# Altium PCB filament-width-sensor.PcbDoc
Units mm, origin at the board's own origin, x right, y up, seen from the top; angles counter-clockwise.
Board outline 50 x 23 mm, 2 copper layers (Top Layer, Bottom Layer), stack 1.581 mm thick; 31 components, 25 nets, 138 pads, 27 vias.
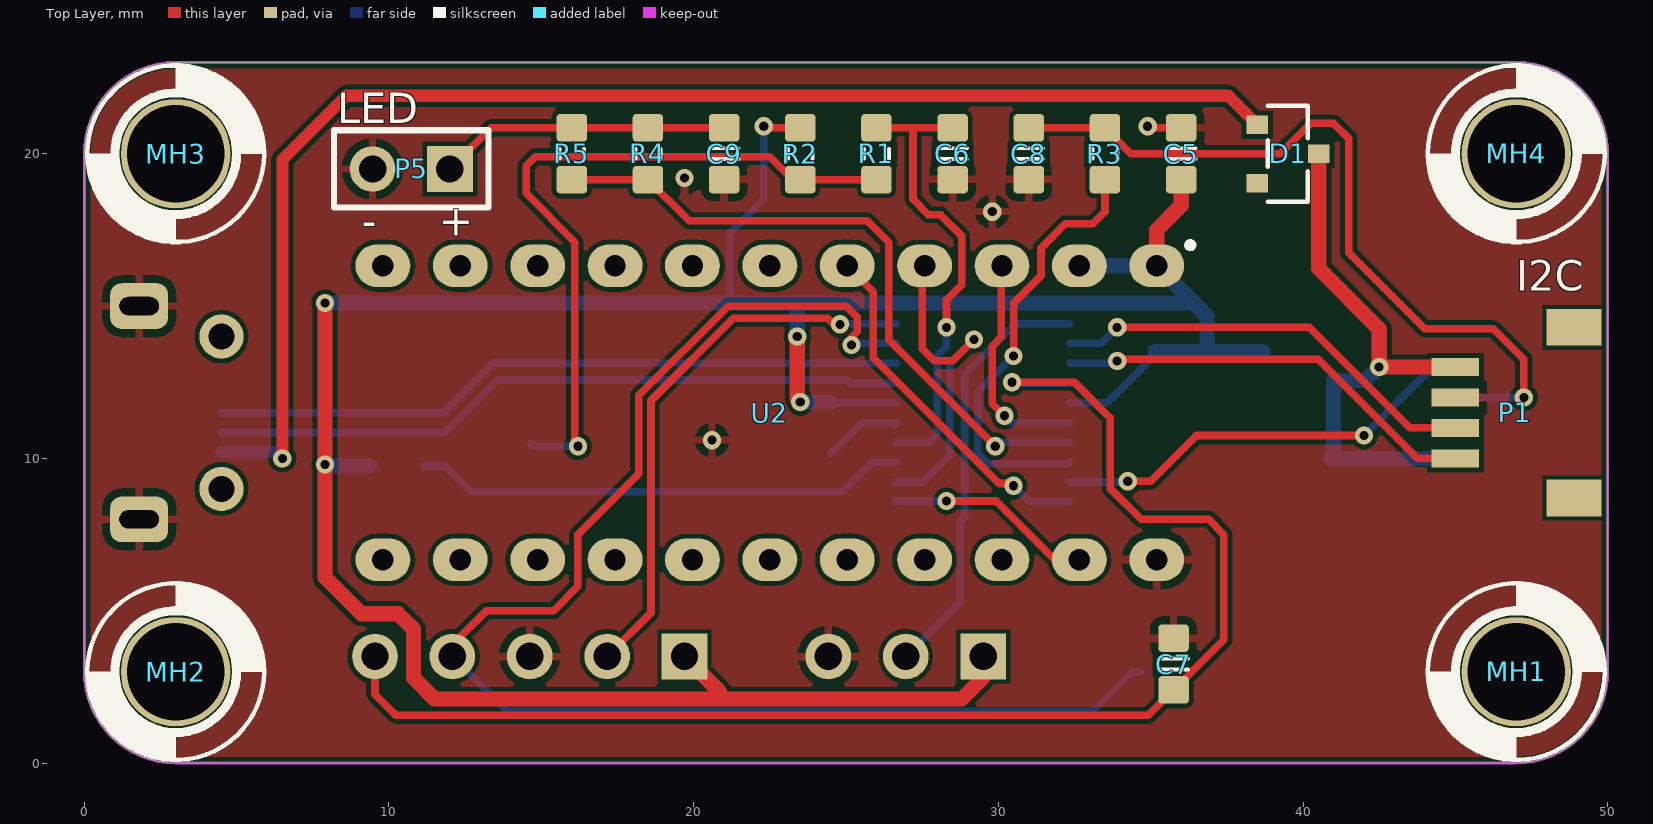
[diagram p0: Top Layer view]
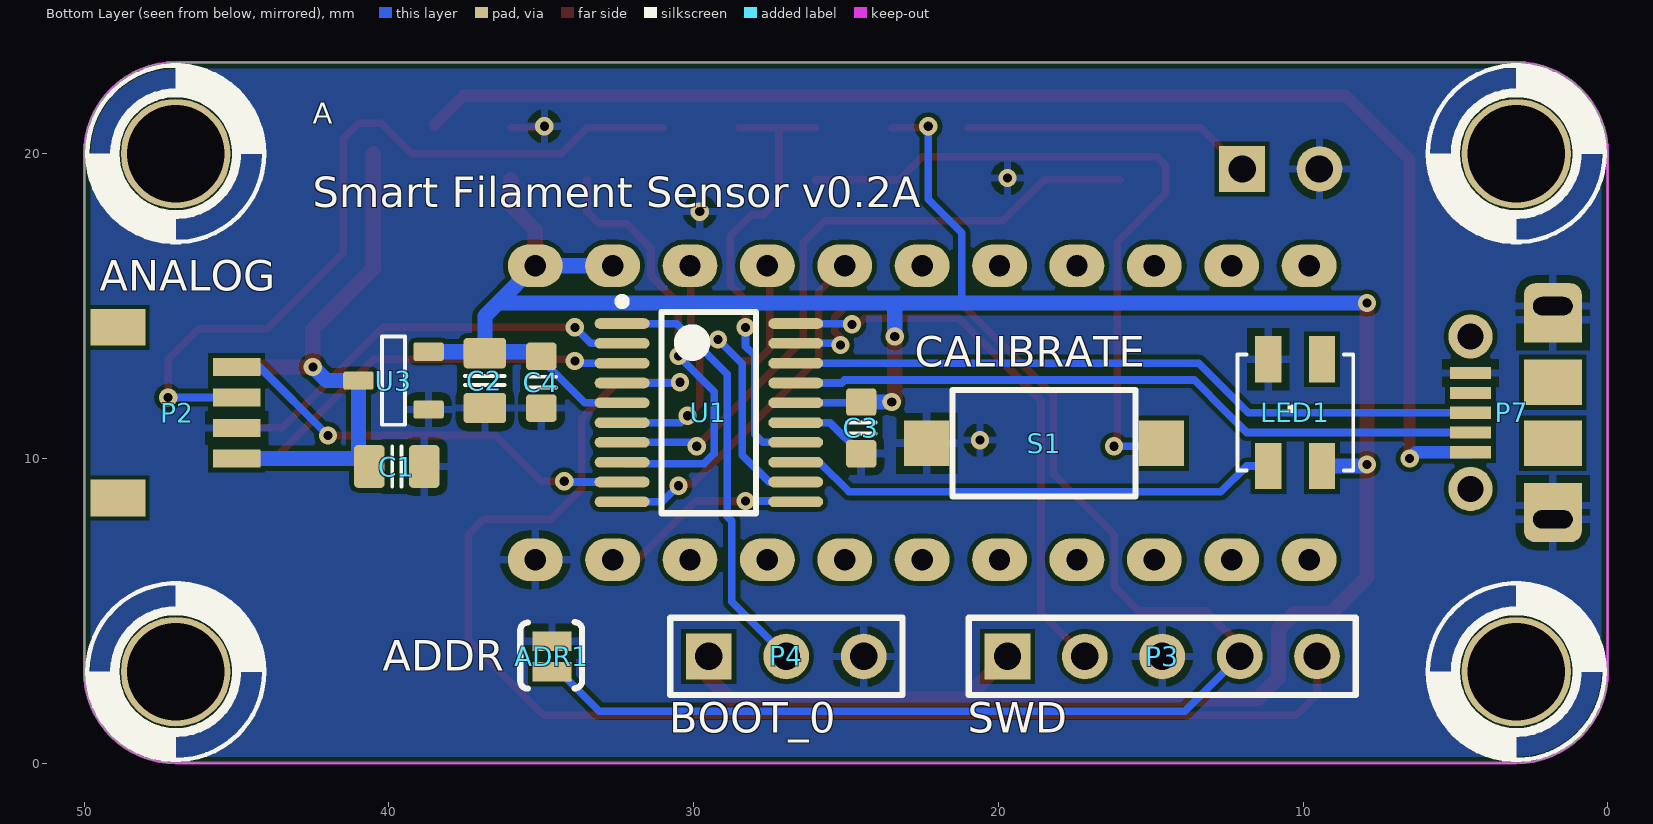
[diagram p1: Bottom Layer view, seen from below]
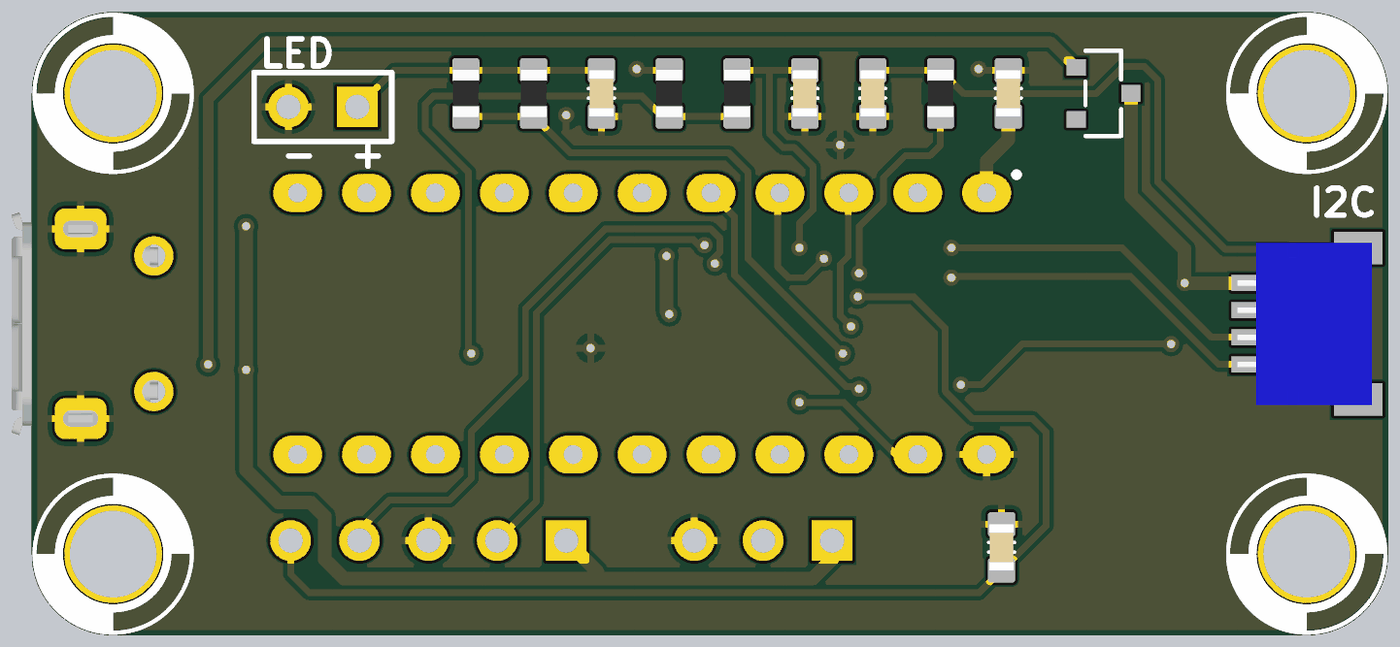
[diagram p2: 3D render of the assembled board from above, using the file's embedded part models]
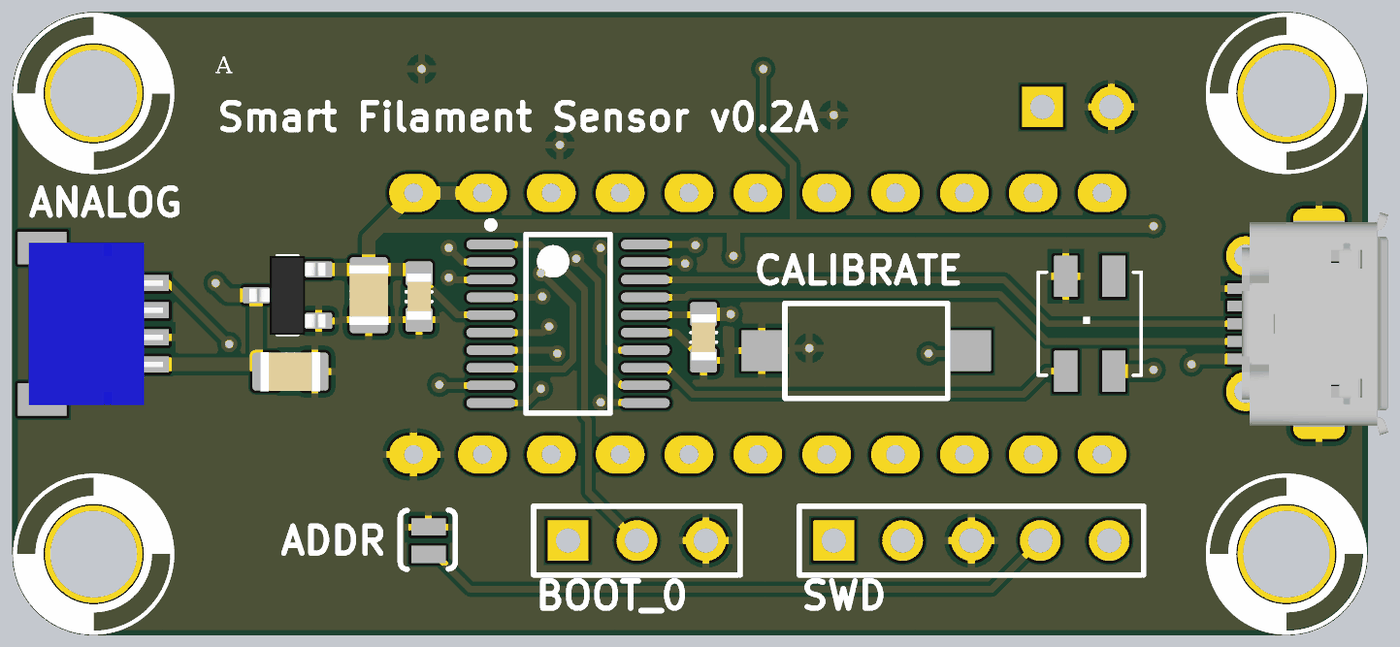
[diagram p3: 3D render of the assembled board from below, using the file's embedded part models]

## Layer stack, top to bottom
Top Solder: solder mask 0.0102, Solder Resist, Dk 3.5
Top Layer: signal copper 0.0356
Dielectric1: dielectric 1.51, FR-4, Dk 4.8
Bottom Layer: signal copper 0.0356
Bottom Solder: solder mask 0.0102, Solder Resist, Dk 3.5

## Board outline
0,3 ccw(c3,3) 3,0 47,0 ccw(c47,3) 50,3 50,20 ccw(c47,20) 47,23 3,23 ccw(c3,20) 0,20

## Design rules (kind name [scope] priority, off if disabled: settings)
Clearance [All] p1: gap=0.15
DiffPairsRouting [All] p1: maxlimit=0.5 minlimit=0.25 mostfreqgap=0.25 toplayer_minwidth=0.25 toplayer_maxwidth=0.5 toplayer_prefwidth=0.25 bottomlayer_minwidth=0.25 bottomlayer_maxwidth=0.5 bottomlayer_prefwidth=0.25 maxuncoupledlength=12.7
FabricationTestPointUsage TestPointUsage [All] p1: valid=0 allowmultiple=FALSE
FabricationTestpoint Testpoint [All] p1: side=3 testpointundercomponent=TRUE minsize=1.016 maxsize=2.54 preferedsize=1.524 minholesize=0 maxholesize=1.016 preferedholesize=0.813 testpointgrid=0.025 allowsidetop=TRUE allowsidebottom=TRUE usegrid=TRUE gridtolerance=0
HoleSize [All] p1: absolutevalues=TRUE maxlimit=3.5 minlimit=0.025 maxpercent=80.000 minpercent=20.000
PolygonConnect [All] p1: connectstyle=Relief reliefconductorwidth=0.254 reliefentries=4 polygonreliefangle="90 Angle" airgapwidth=0.254
RoutingVias [All] p1: holewidth=0.3 width=0.6 viastyle="Through Hole" minholewidth=0.3 minwidth=0.6 maxholewidth=1 maxwidth=1.4
SilkToSolderMaskClearance SilkscreenOverComponentPads [IsPad] p1: minsilkscreentomaskgap=0.254 clearancetoexposedcopper=TRUE
SolderMaskExpansion [All] p1: expansion=0.102
Width [All] p1: maxlimit=1 minlimit=0.2 preferedwidth=0.25
25 further rules are at their usual default settings.

## Classes and differential pairs
differential pair USB: +USB_P -USB_N

## Components (designator, comment, footprint, x,y, rotation, side; value= is the part's Value field where it differs from the comment)
ADR1 "JUMPER-PAD-2-NC_BY_TRACE" PAD-JUMPER-2-NC_BY_TRACE_YES_SILK 34.65,3.5 r270 bottom
C1 "approved sub OK" CAPC2012X135N 39.742,9.734 r180 bottom
C2 "approved sub OK" CAPC2012X135N 36.852,12.554 r270 bottom
C3 "approved sub OK" CAPC1608X90N 24.5,11 r270 bottom
C4 "approved sub OK" CAPC1608X90N 35,12.5 r270 bottom
C5 "approved sub OK" CAPC1608X90N 36,20 r90 top
C6 "approved sub OK" CAPC1608X90N 28.5,20 r270 top
C7 "approved sub OK" CAPC1608X90N 35.75,3.25 r90 top
C8 "approved sub OK" CAPC1608X90N 31,20 r270 top
C9 "approved sub OK" CAPC1608X90N 21,20 r270 top
D1 "Diode   SMADIODE - SMA Surface Mount Package  20V 1A Schottky Diode Digikey: 641-1014-6-ND    DO-1N4148 - Through Hole Small Current Diode SOD-123 20V 1 A (.5mV Vf) Schottky Diode - Digikey: MBRX120TPMSCT-ND    SOD-323 10V 570mA (.38mV Vf, 3ns) Schottky Diode - Digikey: ZLLS410CT-ND    SOD-523 30V 30mA Schottky Diode (RB751S-40TE61) - Digikey: RB751S-40TE61CT-ND    SOT23-R/W - SOT23 Package (R = Solder Paste/Reflow Ovens, W = Hand-Soldering)  BAT54Film 40V 300mA - Digikey: 497-7162-1-ND" SOT23-R 39.5,20 r270 top
LED1 "WS2812B3535" LED3535 10.25,11.5 r90 bottom
MH1 "M3" M3-Hole-2 47,3 r0 top
MH2 "M3" M3-Hole-2 3,3 r0 top
MH3 "M3" M3-Hole-2 3,20 r0 top
MH4 "M3" M3-Hole-2 47,20 r0 top
P1 "I2C" SM04B-SRSS-TB 45,13 r0 top
P2 "ANA" SM04B-SRSS-TB 45,10 r0 bottom
P3 "SWD" HDR1X5 19.7,3.5 r180 bottom
P4 "BOOT_SEL" HDR1X3 29.5,3.5 r180 bottom
P5 "LED" HDR1X2 12,19.5 r180 top
P7 "Micro-USB B Socket" "Micro-USB B Molex 105017-0001" 4.5,11.5 r90 bottom
R1 "Thick Film" RESC1608X55N 26,20 r270 top
R2 "Thick Film" RESC1608X55N 23.5,20 r270 top
R3 "Thick Film" RESC1608X55N 33.5,20 r270 top
R4 "Thick Film" RESC1608X55N 18.5,20 r90 top
R5 "RES_EMPTY_0603" RESC1608X55N 16,20 r90 top
S1 "CALIBRATE" "SW-PB SMD 2pin" 18.5,10.5 r0 bottom
U1 "STM32F042F4P6" STM-TSSOP20_N 29.5,11.5 r180 bottom
U2 "TCD1304AP" "TCD1304AP LINEAR CCD" 22.5,11.5 r180 top
U3 "AP7313-33SR" SOT23-3 39.852,12.554 r0 bottom

## Footprints (in the part's own frame and the unit in brackets; to place one, negate y for a bottom-side part, rotate by r counter-clockwise, add the part's x,y. Pads: shape width x height; smd on the part's side, far side on the other; paste and mask are expansions set on the pad)
CAPC1608X90N [mm] "Chip Capacitor, Body 1.6x0.8mm, EIA 0603, IPC Medium Density"
  round 0.254 on Mech15: 0(0,0)
  rrect25% 0.9x1 smd: 1(-0.85,0) 2(0.85,0)
  Top Layer pour cut-out: -0.6,0.5 -0.4,0.7 0.4,0.7 0.6,0.5 0.6,-0.5 0.4,-0.7 -0.4,-0.7 -0.6,-0.5
  silkscreen extent -0.18,-0.48 0.18,0.48, body extent -0.85,-0.45 0.85,0.45, height 0.89
CAPC2012X135N [mm] "Chip Capacitor, Body 2.0x1.2mm, EIA 0805, IPC Medium Density"
  round 0.254 on Mech15: 0(0,0)
  rrect25% 1x1.4 smd: 1(-0.9,0) 2(0.9,0)
  Top Layer pour cut-out: -0.675,0.7 -0.475,0.9 0.475,0.9 0.675,0.7 0.675,-0.7 0.475,-0.9 -0.475,-0.9 -0.675,-0.7
  silkscreen extent -0.15,-0.65 0.15,0.65, body extent -1.1,-0.72 1.1,0.73, height 1.34
HDR1X2 [mm] "Connector; Header; 2 Position"
  rect 1.5x1.5 hole 0.9: 1(0,0)
  round 1.5 hole 0.9: 2(2.54,0)
  silkscreen extent -1.27,-1.27 3.81,1.27
HDR1X3 [mm] "Connector; Header; 3 Position"
  rect 1.5x1.5 hole 0.9: 1(0,0)
  round 1.5 hole 0.9: 2(2.54,0) 3(5.08,0)
  silkscreen extent -1.27,-1.27 6.35,1.27
HDR1X5 [mm] "Connector; Header; 5 Position"
  rect 1.5x1.5 hole 0.9: 1(0,0)
  round 1.5 hole 0.9: 2(2.54,0) 3(5.08,0) 4(7.62,0) 5(10.16,0)
  silkscreen extent -1.27,-1.27 11.43,1.27
LED3535 [mil]
  rect 59.69x34 smd: 1(-68.9,35) 2(-68.9,-34.45) 3(69,-34.45) 4(69,35)
  silkscreen extent -75,-75 75,75
M3-Hole-2 [mm]
  round 3.6 hole 3.2: M3(0,0)
  silkscreen extent -2.9,-2.93 2.9,2.93
"Micro-USB B Molex 105017-0001" [mm]
  round 1.45 hole 0.85: 4(-2.5,0) 5(2.5,0)
  rect 1.5x1.9 smd: 6(-1,-2.7) 7(1,-2.7) SHIELD(-3.05,-2.7) SHIELD(3.05,-2.7)
  rect 0.4x1.35 smd: D+(0,0) D-(-0.65,0) GND(1.3,0) ID(0.65,0) VBUS(-1.3,0)
  rrect50% 1.5x1.9 hole 0.6 slot 1.3 at 90 deg paste+0: SHIELD(-3.5,-2.7) SHIELD(3.5,-2.7)
  body extent -4.1,-5.25 4.1,0.15, height 2.68
PAD-JUMPER-2-NC_BY_TRACE_YES_SILK [mm]
  rect 0.635x1.27 smd: 1(-0.5,0) 2(0.508,0)
RESC1608X55N [mm] "Chip Resistor, Body 1.6x0.8mm, EIA 0603, IPC Medium Density"
  round 0.254 on Mech15: 0(0,0)
  rrect25% 0.9x1 smd: 1(-0.85,0) 2(0.85,0)
  Top Layer pour cut-out: -0.6,0.5 -0.4,0.7 0.4,0.7 0.6,0.5 0.6,-0.5 0.4,-0.7 -0.4,-0.7 -0.6,-0.5
  silkscreen extent -0.15,-0.41 0.15,0.41, body extent -0.87,-0.47 0.88,0.48, height 0.54
SM04B-SRSS-TB [mm]
  rect 1.55x0.6 smd: 0(0,0) 1(0,-1) 2(0,-2) 3(0,-3)
  rect 1.8x1.2 smd: ""(3.9,-4.3) ""(3.9,1.3)
  body extent -0.55,-4.5 4.4,1.5, height 2.96
SOT23-3 [mm] "SOT23, 3 pin"
  round 0.5 on Mech15: 0(0,0)
  rrect25% 1x0.6 smd: 1(-1.15,0.95) 2(-1.15,-0.95) 3(1.15,0)
  silkscreen extent -0.38,-1.45 0.38,1.45, body extent -1.4,-1.45 1.4,1.45, height 1.29
SOT23-R [mil]
  rect 24x28 smd: 1(-37.4,-39.37) 2(38,-39.37) 3(0,40)
  silkscreen extent -62,-26 62,26
STM-TSSOP20_N [mm] "SOP, 20-Leads, Body 6.6x4.5mm, Pitch 0.65mm, IPC Medium Density"
  oval 1.8x0.35 smd: 1(-2.85,2.925) 2(-2.85,2.275) 3(-2.85,1.625) 4(-2.85,0.975) 5(-2.85,0.325) 6(-2.85,-0.325) 7(-2.85,-0.975) 8(-2.85,-1.625) 9(-2.85,-2.275) 10(-2.85,-2.925) 11(2.85,-2.925) 12(2.85,-2.275) 13(2.85,-1.625) 14(2.85,-0.975) 15(2.85,-0.325) 16(2.85,0.325) 17(2.85,0.975) 18(2.85,1.625) 19(2.85,2.275) 20(2.85,2.925)
  silkscreen extent -2.98,-3.3 1.55,3.77, body extent -2.25,-3.3 2.25,3.3, height 1.2
"SW-PB SMD 2pin" [mm]
  rect 1.5x1.5 smd: 1(-3.85,0) 2(3.85,0)
  silkscreen extent -3,-1.75 3,1.75
"TCD1304AP LINEAR CCD" [mm]
  oval 1.8x1.4 hole 0.7: 6(0,-4.825) 7(2.54,-4.825) 8(5.08,-4.825) 9(7.62,-4.825) 10(10.16,-4.825) 11(12.7,-4.825) 12(12.7,4.825) 13(10.16,4.825) 14(7.62,4.825) 15(5.08,4.825) 16(2.54,4.825) 17(0,4.825) 18(-2.54,4.825) 19(-5.08,4.825) 20(-7.62,4.825) GND(-12.7,4.825) ICG(-7.62,-4.825) MC(-5.08,-4.825) OS(-10.16,4.825) SH(-2.54,-4.825) VAD(-10.16,-4.825) VDD(-12.7,-4.825)

## Part data
C1: library part CAPC_10u_0805_10V, "Capacitor SMD Cer 10uF 10% 10V X5R 0805"
C2: library part CAPC_4u7_0805, "Capacitor SMD Cer 4.7uF 10% 16V X5R 0805"
C3 C4 C5 C6 C7: library part CAPC_100n_0603_X7R_50V_10%, "Capacitor SMD Cer 100nF 10% 50V X7R 0603"
C8 C9: library part CAPC_1u_0603_X7R_16V_10%, "Capacitor SMD Cer 1uF 10% 16V X7R 0603"
D1: library part DIODESOT23_REFLOW
MH1 MH2 MH3 MH4: library part "Screw Hole"
P1 P2: library part SM04B-SRSS-TB
P3: library part "Header 5", "Header, 5-Pin"
P4: library part "Header 3", "Header, 3-Pin"
P5: library part "Header 2", "Header, 2-Pin"
R1 R3: library part RES_1K_0603_5%, "Resistor SMD chip 1k Ohm 0.1W 5% 0603"
R2: library part RES_10K_0603_5%, "Resistor SMD chip 10k Ohm 0.1W 5% 0603"
R4: library part RES_120R_0603_5%, "Resistor SMD chip 120 Ohm 0.1W 5% 0603"
R5: "Resistor, 08603 SMD, Empty footprint"
S1: library part SW-PB
U1: library part STM32F030F4P6, "ARM Cortex-M0 32-bit MCU, 16 KB Flash, 4 KB Internal RAM, 15 I/Os, 20-pin TSSOP, -40 to 85 degC, Tube"
U3: library part VREG_3V3_AP7313-33SR, "Voltage Regulator 3.3V LDO SOT23R-3 SMD"

## Via types
v1: diameter 0.6, hole 0.3, Top Layer to Bottom Layer, tented both sides, 27 vias

## Nets (pads, with @x,y where several pads share a name; then routed paths per layer and width w, separated by ;. In a path a pad name is that pad's centre, name@x,y a point inside that pad or via, vN(x,y) a via of type N, cw(c..) or ccw(c..) an arc to the next point about the centre after c; other vN are vias at no path point)
3V3: C2.1 C3.1 C4.1 C5.1 LED1.2 P3.1 P4.1 R2.1 U1.5 U1.16 U2.VAD U2.VDD U3.2 | length 95.9
  Top Layer w0.25: v1(22.3,20.9) 22.35,20.85 R2.1
  Top Layer w0.5: v1(7.9,15.1) v1(7.9,9.8) 7.9,6.1 9.1,4.9 10.3,4.9 10.8,4.4 10.8,2.8 11.5,2.1 28.8,2.1 29.5,2.8 P4.1 ; P3.1 20.85,2.35 ; v1(23.4,14) 23.4,11.95 v1(23.5,11.85) ; U2.VDD 35.2,17.5 36,18.3 C5.1
  Bottom Layer w0.25: 21.2,15.1 21.2,17.4 22.3,18.5 v1(22.3,20.9) ; C3.1 24.525,11.825 U1.16 ; U1.5 33.575,11.825 35,13.25 C4.1
  Bottom Layer w0.5: v1(7.9,9.8) 7.95,9.75 LED1.2 ; v1(7.9,15.1) 21.2,15.1 23.4,15.1 ; v1(23.4,14) 23.4,15.1 ; v1(23.5,11.85) C3.1 ; U2.VAD U2.VDD 36.425,15.1 ; C4.1@35.154,13.504 C2.1@36.852,13.504 ; C2.1 C2.1@36.852,13.504 ; U3.2 C2.1@36.852,13.504 ; 23.4,15.1 36.425,15.1 ; 36.425,15.1 36.852,14.673 C2.1@36.852,13.504
ADR1: ADR1.2 P3.4 U1.19 | length 47.4
  Top Layer w0.25: P3.4 12.08,3.88 13.2,5 15.4,5 16.2,5.8 16.2,7.5 18.2,9.5 18.2,12.066 21.134,15 25.013,15 25.375,14.638 25.375,14.162 25.18,13.967 v1(25.18,13.72)
  Bottom Layer w0.25: P3.4 13.88,1.7 33.1,1.7 34.392,2.992 ADR1.2 ; v1(25.18,13.72) 25.125,13.775 U1.19
BOOT0: P4.2 U1.1 | length 14.2
  Bottom Layer w0.25: P4.2 28.755,5.295 28.755,7.945 28.9,8.09 28.9,12.766 30.559,14.425 U1.1
BUTTON: C6.1 R1.1 U1.14 | length 15.2
  Top Layer w0.25: R1.1 27.2,20.85 ; v1(28.3,14.3) 28.3,15.2 28.8,15.7 28.8,17.3 28.1,18 27.7,18 27.2,18.5 27.2,20.85 ; C6.1 27.2,20.85
  Bottom Layer w0.25: U1.14 27.725,10.525 28,10.8 28,13.381 28.3,13.681 v1(28.3,14.3)
FIL_DET: P2.3 U1.9 | length 14.2
  Top Layer w0.25: v1(34.25,9.25) 35,9.25 36.5,10.75 v1(42,10.75)
  Bottom Layer w0.25: U1.9 34.225,9.225 v1(34.25,9.25) ; v1(42,10.75) 44.25,13 P2.3
GND: ADR1.1 C1.2 C2.2 C3.2 C4.2 C5.2 C6.2 C7.2 C8.2 C9.2 LED1.4 P1.1 P2.1 P3.3 P4.3 P5.2 P7.GND P7.SHIELD S1.2 U1.15 U2.GND U3.1 | length 3.7
  Top Layer w0.25: v1(34.9,20.9) 34.95,20.85 C5.2
  Bottom Layer w0.25: C3.2 25.525,11.175 U1.15 U1.15@26.65,11.125
  other v1: 20.6,10.6 29.8,18.1 19.7,19.2
HOST_SCL: P1.3 U1.3 | length 14
  Top Layer w0.25: v1(33.9,13.2) 33.95,13.25 40.5,13.25 43.75,10 P1.3
  Bottom Layer w0.25: U1.3 v1@33.9,13.125
HOST_SDA: P1.2 U1.2 | length 14.2
  Top Layer w0.25: v1(33.9,14.3) 40.2,14.3 43.5,11 P1.2
  Bottom Layer w0.25: U1.2 33.375,13.775 v1(33.9,14.3)
LED: R4.1 R5.1 U1.7 | length 21.9
  Top Layer w0.25: R5.1 R4.1 19.85,17.8 25.7,17.8 26.4,17.1 26.4,13.9 v1(29.9,10.4)
  Bottom Layer w0.25: v1(29.9,10.4) 30.025,10.525 U1.7
LOA_ICG: U1.6 U2.ICG | length 7.5
  Top Layer w0.25: U2.ICG 30.1,16.325 30.1,13.987 29.8,13.687 29.8,11.8 v1(30.2,11.4)
  Bottom Layer w0.25: v1(30.2,11.4) 30.425,11.175 U1.6
LOA_MC: U1.12 U2.MC | length 11.2
  Top Layer w0.25: U2.MC 27.5,16.245 27.5,13.6 27.9,13.2 28.5,13.2 v1(29.2,13.9)
  Bottom Layer w0.25: U1.12 27.525,9.225 28.4,10.1 28.4,13.1 v1(29.2,13.9)
LOA_OS: U1.11 U2.OS | length 6.8
  Top Layer w0.25: v1(28.3,8.6) 29.934,8.6 31.859,6.675 U2.OS
  Bottom Layer w0.25: U1.11 26.675,8.6 v1(28.3,8.6)
LOA_SH: U1.10 U2.SH | length 11.8
  Top Layer w0.25: U2.SH 25.9,15.465 25.9,13.3 30.025,9.175 30.425,9.175 v1(30.5,9.1)
  Bottom Layer w0.25: v1(30.5,9.1) 31.025,8.575 U1.10
NetC9_1: C9.1 P5.1 R4.2 R5.2 | length 9.6
  Top Layer w0.25: P5.1 13.35,20.85 R5.2 R4.2 C9.1
NetR1_2: R1.2 R2.2 S1.1 | length 23.5
  Top Layer w0.25: v1(16.2,10.4) 16.1,10.4 16.1,17.1 14.5,18.7 14.5,19.6 14.8,19.9 22.5,19.9 23.25,19.15 R2.2 R1.2
  Bottom Layer w0.25: S1.1 14.75,10.4 v1(16.2,10.4)
NetR3_2: R3.2 U1.8 | length 14.4
  Top Layer w0.25: v1(30.5,13.363) 30.5,15.1 31.4,16 31.4,16.9 32.2,17.7 33.1,17.7 33.5,18.1 R3.2
  Bottom Layer w0.25: v1(30.5,13.363) 29.325,12.188 29.325,10.162 29.662,9.825 32.3,9.825 U1.8
NRST: C7.1 P3.5 U1.4 | length 46.1
  Top Layer w0.25: P3.5 9.54,2.263 10.228,1.575 34.925,1.575 C7.1 37.4,4.05 37.4,7.5 36.9,8 34.687,8 33.675,9.012 33.675,11.325 32.5,12.5 v1(30.45,12.5)
  Bottom Layer w0.25: v1(30.45,12.5) 30.475,12.475 U1.4
PWM_OUT: C8.1 P2.2 R3.1 | length 25.9
  Top Layer w0.25: C8.1 R3.1 34.35,20 39.25,20 40.25,21 41,21 41.5,20.5 41.5,16.75 44,14.25 46.25,14.25 47.25,13.25 v1(47.25,12)
  Bottom Layer w0.25: P2.2 v1(47.25,12)
SWCLK: P3.2 U1.20 | length 18.3
  Top Layer w0.25: P3.2 18.6,4.94 18.6,11.9 21.3,14.6 24.4,14.6 24.6,14.4 v1(24.8,14.4)
  Bottom Layer w0.25: v1(24.8,14.4) 24.825,14.425 U1.20
USB_N: P7.D- U1.17 | length 22.9
  Bottom Layer w0.25: P7.D- 11.85,10.85 12.5,11.5 13.575,12.575 25.048,12.575 25.148,12.475 U1.17
USB_P: P7.D+ U1.18 | length 22.8
  Bottom Layer w0.25: P7.D+ 11.793,11.5 13.418,13.125 U1.18
USB_VDD: D1.1 P7.VBUS | length 45.2
  Top Layer w0.25: D1.1 D1.1@38.5,21
  Top Layer w0.4: v1(6.5,10) 6.5,19.8 8.6,21.9 37.55,21.9 D1.1
  Bottom Layer w0.4: P7.VBUS 6.3,10.2 v1(6.5,10)
VDD: C1.1 D1.3 P1.0 P2.0 U3.3 | length 18.7
  Top Layer w0.5: D1.3 40.516,16.234 42.5,14.25 v1(42.5,13) P1.0
  Bottom Layer w0.5: v1(42.5,13) 42.054,12.554 U3.3 41.002,10.094 40.908,10 P2.0
WS2812B: LED1.1 U1.13 | length 16.3
  Bottom Layer w0.25: LED1.1 11.85,9.75 12.7,8.9 24.9,8.9 25.875,9.875 U1.13
WS2812B_OUT: LED1.3
pads on no net: C1.0 C2.0 C3.0 C4.0 C5.0 C6.0 C7.0 C8.0 C9.0 D1.2 MH1.M3 MH2.M3 MH3.M3 MH4.M3 P1. P2. P7.4 P7.5 P7.6 P7.7 P7.ID R1.0 R2.0 R3.0 R4.0 R5.0 U2.6 U2.7 U2.8 U2.9 U2.10 U2.11 U2.12 U2.13 U2.14 U2.15 U2.16 U2.17 U2.18 U2.19 U2.20 U3.0

## Polygon pours and split planes (outlines as drawn)
GND on Top Layer "Bottom Layer-GND" (solid, remove dead copper, pour order 10): 0,-0.071 0,23 50.011,23 50.011,-0.071
GND on Bottom Layer "Bottom Layer-GND" (solid, remove dead copper, pour order 8): 0,0 0,23 50,23 50,0

## Keep-outs
Keep-Out Layer:
  the board outline again, w0.1

## Silkscreen, mask and mechanical layers (free items; w line width, h text height)
Top Overlay:
  circle w0.2: c36.3,17 r0.1
  text "LED" at 8.3,21 h1
  text "-" at 9.1,17.3 h1
  text "+" at 11.64,17.3 h1
  text "I2C" at 47,15.5 h1
Bottom Overlay:
  lines w0.2: 33.913,2.453 cw(c33.913,2.708) 33.659,2.708 33.659,4.371 cw(c33.913,4.371) 33.913,4.625 ; 35.437,2.441 ccw(c35.437,2.695) 35.691,2.695 35.691,4.358 ccw(c35.437,4.358) 35.437,4.612
  text "A" at 42.5,20.75 h1.2
  text "Smart Filament Sensor v0.2A" at 42.5,18.25 h1
  text "ANALOG" at 49.5,15.5 h1
  text "CALIBRATE" at 22.75,13 h1
  text "ADDR" at 40.211,3.025 h1
  text "SWD" at 21,1 h1
  text "BOOT_0" at 30.8,1 h1
Mechanical 16:
  drawing of 1874 lines, arcs and shapes, not listed
  text "1" at -60.319,73.869 h1.78
  text "2" at 12.325,73.869 h1.78
  text "3" at 85.477,73.869 h1.78
  text "4" at 158.375,73.869 h1.78
  text "A" at -94.66,50.857 h1.78
  text "A" at 192.36,50.857 h1.78
  text "B" at -94.66,2.8 h1.78
  text "B" at 192.36,2.8 h1.78
  text "C" at -94.66,-45.714 h1.78
  text "C" at 192.36,-45.714 h1.78
  text "ENGINEER:" at 77.425,-82.722 h1.14
  text "TITLE:" at 115.525,-82.722 h1.14
  text "PCB DESIGNER:" at 77.425,-90.215 h1.14
  text "D" at -94.66,-93.72 h1.78
  text "D" at 192.36,-93.72 h1.78
  text "DATE:" at 77.425,-97.962 h1.14
  text "PART NO.:" at 115.525,-97.962 h1.14
  text "REV:" at 168.865,-97.962 h1.14
  text "Altium Limited" at 44.405,-100.502 h1.78
  text ".PRINT_DATE" at 78.695,-101.01 h1.78
  text "12a Rodborough Rd" at 44.405,-103.042 h1.78
  text "Frenchs Forest" at 44.405,-105.582 h1.78
  text "FILE NAME:" at 77.425,-105.582 h1.14
  text "DWG NO:" at 115.525,-105.582 h1.14
  text "SCALE:" at 168.865,-105.582 h1.14
  text "NSW 2086" at 44.405,-108.122 h1.78
  text ".PCB_FILE_NAME_NO_PATH" at 78.695,-108.63 h1.78
  text "1" at -60.319,-114.091 h1.78
  text "2" at 12.325,-114.091 h1.78
  text "3" at 85.477,-114.091 h1.78
  text "4" at 158.375,-114.091 h1.78

## Dimensions
29.946,15.52 to 60.986,15.52 on Mechanical 16
29.466,21 to 29.466,-21 on Mechanical 16
29.946,-15.52 to 29.946,15.52 on Mechanical 16